# Altium PCB JacdacKeyboardKey 46.PcbDoc
Units mm, origin at the board's own origin, x right, y up, seen from the top; angles counter-clockwise.
Board outline 21.5 x 28.2 mm, 2 copper layers (Top Layer, Bottom Layer), stack 1.525 mm thick; 22 components, 9 nets, 68 pads, 11 vias.
Unrouted connection lines stored in the file: 10.
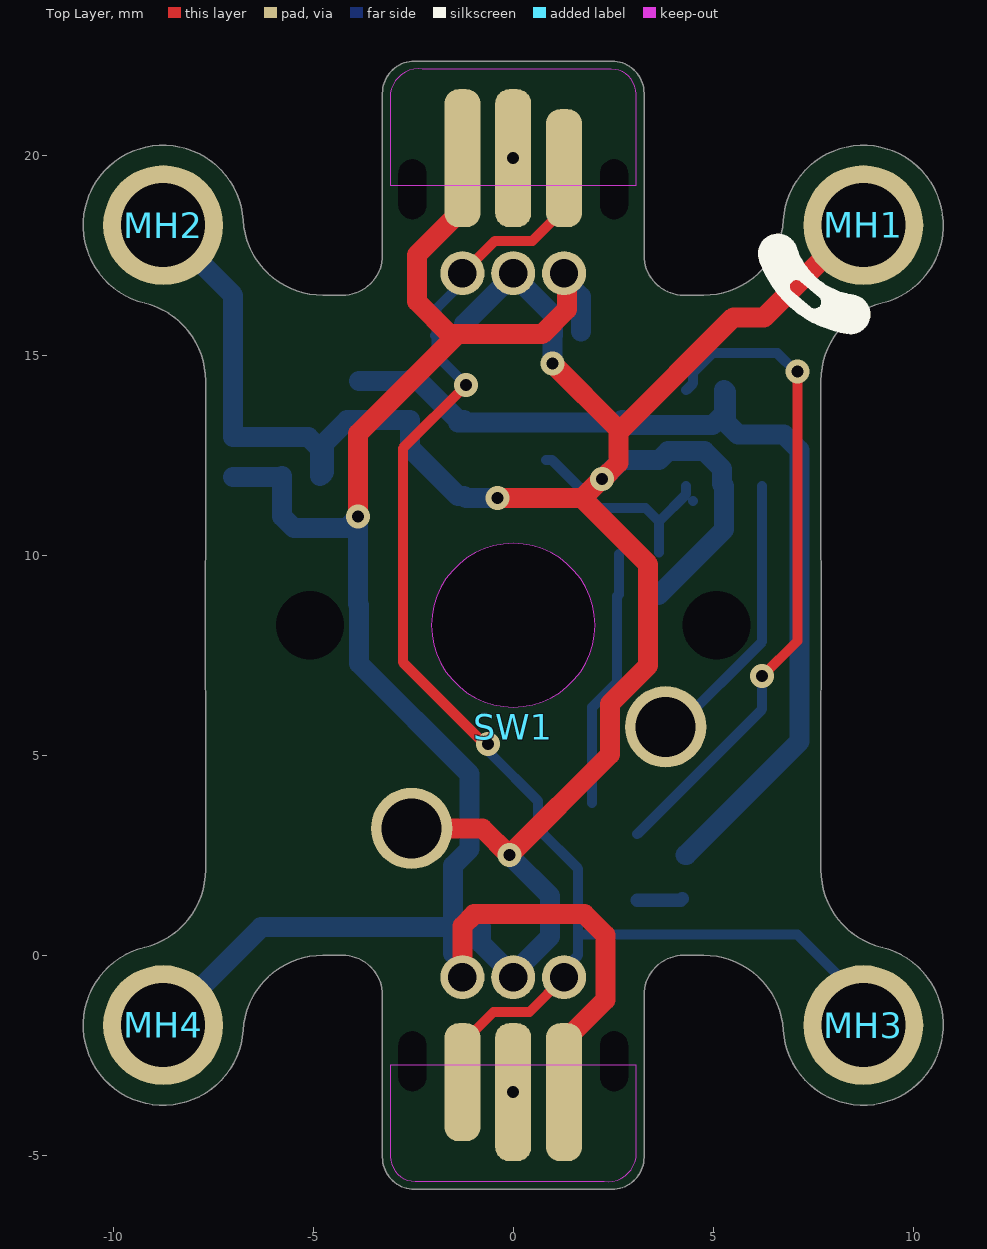
[diagram p0: Top Layer view]
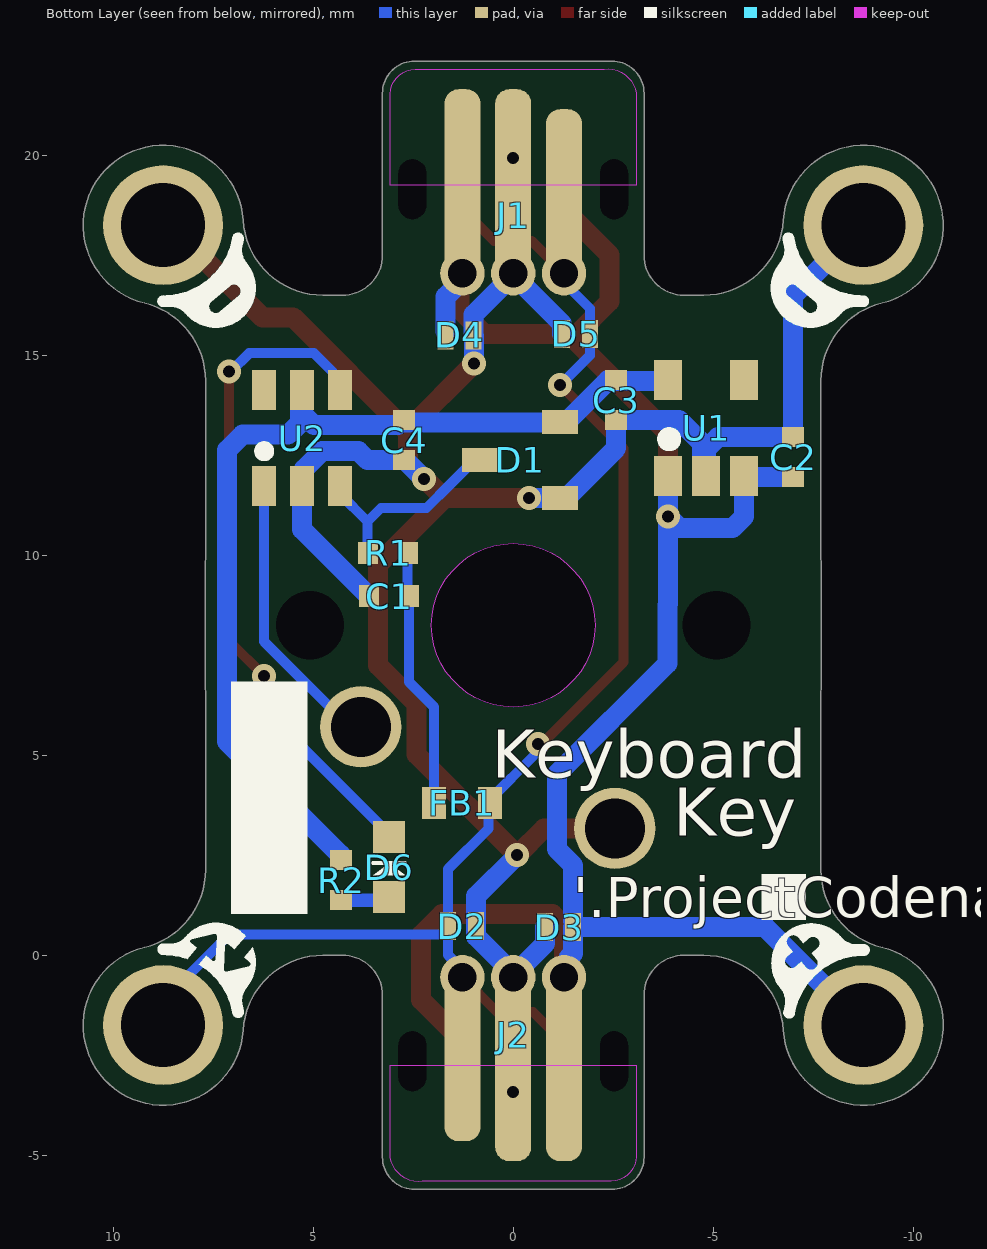
[diagram p1: Bottom Layer view, seen from below]

## Layer stack, top to bottom
Top Solder: solder mask 0.0102, Solder Resist, Dk 3.5
Top Layer: signal copper 0.0356
Dielectric 1: core 1.454, FR-4, Dk 4.2
Bottom Layer: signal copper 0.0356
Bottom Solder: solder mask 0.0102, Solder Resist, Dk 3.5

## Board outline
-9.222,0.194 ccw(c-8.75,-1.75) -6.754,-1.875 cw(c-4.758,-2) -4.758,0 -4.27,0 cw(c-4.27,-1) -3.27,-1 -3.27,-5.05 ccw(c-2.471,-5.051) -2.47,-5.85 2.47,-5.85 ccw(c2.471,-5.051) 3.27,-5.05 3.27,-1 cw(c4.27,-1) 4.27,0 4.758,0 cw(c4.758,-2) 6.754,-1.875 ccw(c8.75,-1.75) 9.222,0.194 cw(c9.693,2.137) 7.693,2.137 7.692,5 7.694,8.25 7.692,11.5 7.693,14.363 cw(c9.693,14.363) 9.222,16.306 ccw(c8.75,18.25) 6.754,18.375 cw(c4.758,18.5) 4.758,16.5 4.27,16.5 cw(c4.27,17.5) 3.27,17.5 3.27,21.55 ccw(c2.471,21.551) 2.47,22.35 -2.47,22.35 ccw(c-2.471,21.551) -3.27,21.55 -3.27,17.5 cw(c-4.27,17.5) -4.27,16.5 -4.758,16.5 cw(c-4.758,18.5) -6.754,18.375 ccw(c-8.75,18.25) -9.222,16.306 cw(c-9.693,14.363) -7.693,14.363 -7.692,11.5 -7.694,8.25 -7.692,5 -7.693,2.137 cw(c-9.693,2.137)
cut-out: -2.045,8.25 ccw(c0,8.25) 0,6.205 ccw(c0,8.25) 2.045,8.25 ccw(c0,8.25) 0,10.295 ccw(c0,8.25)

## Design rules (kind name [scope] priority, off if disabled: settings)
AssemblyTestPointUsage [All] p1: valid=2
BoardOutlineClearance [All] p1: gap=0.3 ignorepadtopadclearanceinfootprint=FALSE except(0: Arc-SplitContinuation Track-SplitContinuation SMDPad-SplitContinuation THPad-SplitContinuation Via-SplitContinuation Fill-SplitContinuation Poly-SplitContinuation Region-OutlineEdge Region-SplitContinuation Text-OutlineEdge Text-SplitContinuation; 0.2: Track-OutlineEdge Fill-CavityEdge Fill-CutoutEdge Fill-SplitBarrior Poly-CavityEdge Poly-CutoutEdge Poly-SplitBarrior Text-CavityEdge Text-CutoutEdge Text-SplitBarrior; 0.25: SMDPad-OutlineEdge)
Clearance [All] p1: gap=0.125 ignorepadtopadclearanceinfootprint=FALSE except(0: Arc-Hole Track-Hole SMDPad-Hole THPad-Hole Via-Hole Fill-Hole Poly-Hole Region-Hole Text-Hole)
ComponentClearance [All] p1: gap=0.1 collisioncheckmode=3 verticalgap=0.254 showdistances=FALSE
DiffPairsRouting [All] p1: maxlimit=2 minlimit=0.15 mostfreqgap=0.15 toplayer_minwidth=0.15 toplayer_maxwidth=2 toplayer_prefwidth=0.15 bottomlayer_minwidth=0.15 bottomlayer_maxwidth=2 bottomlayer_prefwidth=0.15 substack1={CB9D278B-8BF5-444A-AAF4-837A2A9DF42D} toplayer_{cb9d278b-8bf5-444a-aaf4-837a2a9df42d}_minwidth=0.381 toplayer_{cb9d278b-8bf5-444a-aaf4-837a2a9df42d}_maxwidth=0.381 toplayer_{cb9d278b-8bf5-444a-aaf4-837a2a9df42d}_prefwidth=0.381 bottomlayer_{cb9d278b-8bf5-444a-aaf4-837a2a9df42d}_minwidth=0.381 bottomlayer_{cb9d278b-8bf5-444a-aaf4-837a2a9df42d}_maxwidth=0.381 bottomlayer_{cb9d278b-8bf5-444a-aaf4-837a2a9df42d}_prefwidth=0.381 substack2={826B8647-A721-4255-895A-19F9591B9CD1} toplayer_{826b8647-a721-4255-895a-19f9591b9cd1}_minwidth=0.381 toplayer_{826b8647-a721-4255-895a-19f9591b9cd1}_maxwidth=0.381 toplayer_{826b8647-a721-4255-895a-19f9591b9cd1}_prefwidth=0.381 bottomlayer_{826b8647-a721-4255-895a-19f9591b9cd1}_minwidth=0.381 bottomlayer_{826b8647-a721-4255-895a-19f9591b9cd1}_maxwidth=0.381 bottomlayer_{826b8647-a721-4255-895a-19f9591b9cd1}_prefwidth=0.381 substack3={E64FCAF4-1BC8-437D-B1E0-0E5F2DC0F59E} toplayer_{e64fcaf4-1bc8-437d-b1e0-0e5f2dc0f59e}_minwidth=0.381 toplayer_{e64fcaf4-1bc8-437d-b1e0-0e5f2dc0f59e}_maxwidth=0.381 toplayer_{e64fcaf4-1bc8-437d-b1e0-0e5f2dc0f59e}_prefwidth=0.381 bottomlayer_{e64fcaf4-1bc8-437d-b1e0-0e5f2dc0f59e}_minwidth=0.381 bottomlayer_{e64fcaf4-1bc8-437d-b1e0-0e5f2dc0f59e}_maxwidth=0.381 bottomlayer_{e64fcaf4-1bc8-437d-b1e0-0e5f2dc0f59e}_prefwidth=0.381 substack4={E61CE66C-507C-4E1E-8E83-C905434AFC1C} toplayer_{e61ce66c-507c-4e1e-8e83-c905434afc1c}_minwidth=0.381 toplayer_{e61ce66c-507c-4e1e-8e83-c905434afc1c}_maxwidth=0.381 toplayer_{e61ce66c-507c-4e1e-8e83-c905434afc1c}_prefwidth=0.381 bottomlayer_{e61ce66c-507c-4e1e-8e83-c905434afc1c}_minwidth=0.381 bottomlayer_{e61ce66c-507c-4e1e-8e83-c905434afc1c}_maxwidth=0.381 bottomlayer_{e61ce66c-507c-4e1e-8e83-c905434afc1c}_prefwidth=0.381 maxuncoupledlength=25
FabricationTestPointUsage [All] p1: valid=2 allowmultiple=FALSE
HoleSize [All] p1: absolutevalues=TRUE maxlimit=2.54 minlimit=0.2 maxpercent=80.000 minpercent=20.000
MinimumSolderMaskSliver [All] p1: minsoldermaskwidth=0.005
PlaneClearance [All] p1: clearance=0.3
PlaneConnect [All] p1: planeconnectstyle=Relief reliefexpansion=0.5 reliefentries=4 reliefconductorwidth=0.2 reliefairgap=0.3
PolygonConnect "PolygonConnect GND" [isVIA] p1: connectstyle=Relief reliefconductorwidth=0.2 reliefentries=4 polygonreliefangle="90 Angle" airgapwidth=0.2
PolygonConnect [All] p2: connectstyle=Relief reliefconductorwidth=0.2 reliefentries=4 polygonreliefangle="90 Angle" airgapwidth=0.2
RoutingVias [All] p1: holewidth=0.3 width=0.6 viastyle="Through Hole" minholewidth=0.3 minwidth=0.6 maxholewidth=0.5 maxwidth=0.8
SilkToSilkClearance [All] p1: silktosilkclearance=0.001
SilkToSolderMaskClearance [IsPad] p1: minsilkscreentomaskgap=0.05 clearancetoexposedcopper=TRUE
SolderMaskExpansion TENT_VIAS [IsVia] p1: expansion=0.102 istentingtop=TRUE
SolderMaskExpansion [All] p2: expansion=0.075 istentingtop=FALSE
Width POWER [InNetClass('POWER')] p1: maxlimit=2.54 minlimit=0.203 preferedwidth=0.33 substack1={CB9D278B-8BF5-444A-AAF4-837A2A9DF42D} substack2={826B8647-A721-4255-895A-19F9591B9CD1} substack3={E64FCAF4-1BC8-437D-B1E0-0E5F2DC0F59E} substack4={E61CE66C-507C-4E1E-8E83-C905434AFC1C} minimp=50.000000 maximp=50.000000 favimp=50.000000
Width [All] p2: maxlimit=2 minlimit=0.15 preferedwidth=0.15 substack1={CB9D278B-8BF5-444A-AAF4-837A2A9DF42D} substack2={826B8647-A721-4255-895A-19F9591B9CD1} substack3={E64FCAF4-1BC8-437D-B1E0-0E5F2DC0F59E} substack4={E61CE66C-507C-4E1E-8E83-C905434AFC1C} minimp=50.000000 maximp=50.000000 favimp=50.000000
20 further rules are at their usual default settings.

## Components (designator, comment, footprint, x,y, rotation, side; value= is the part's Value field where it differs from the comment)
C1 "CL05C330JB5NNNC" "C0402_0.55MM - without outline" 3.1,8.975 r180 bottom
C2 "CL05A105KP5NNNC" "C0402_0.55MM - without outline" -7,12.45 r270 bottom
C3 "CL05A105KP5NNNC" "C0402_0.55MM - without outline" -2.575,13.875 r90 bottom
C4 "CL05A105KP5NNNC" "C0402_0.55MM - without outline" 2.725,12.875 r90 bottom
D1 "BAT54S" "NXP-BAT54S-TO-236AB - without outline" -0.175,12.375 r0 bottom
D2 "RCLAMP0521P-N" "TVS 0402 - L" 1.275,0.725 r180 bottom
D3 "RCLAMP0521P-N" "TVS 0402 - L" -1.15,0.7 r0 bottom
D4 "RCLAMP0521P-N" "TVS 0402 - L" 1.338,15.496 r180 bottom
D5 "RCLAMP0521P-N" "TVS 0402 - L" -1.575,15.525 r0 bottom
D6 "Everlight Elec'''" "0603 Orange" 3.1,2.2 r270 bottom
FB1 "TDK MPZ1608S102ATA00" "TDK MPZ1608 0.8mm - without outline" 1.275,3.8 r0 bottom
J1 "3 pin JACDAC edge connector" JACDAC_EDGE_CONNECTOR_NO_TRACES 0,16.5 r180 bottom
J2 "3 pin JACDAC edge connector" JACDAC_EDGE_CONNECTOR_NO_TRACES 0,0 r0 bottom
MH1 "MH_5.0MMK_3.0MMC_2.1MMD_PTH" MH_5.0MMK_3.0MMC_2.1MMD_PTH 8.75,18.25 r0 top
MH2 "MH_5.0MMK_3.0MMC_2.1MMD_PTH" MH_5.0MMK_3.0MMC_2.1MMD_PTH -8.75,18.25 r180 top
MH3 "MH_5.0MMK_3.0MMC_2.1MMD_PTH" MH_5.0MMK_3.0MMC_2.1MMD_PTH 8.75,-1.75 r0 top
MH4 "MH_5.0MMK_3.0MMC_2.1MMD_PTH" MH_5.0MMK_3.0MMC_2.1MMD_PTH -8.75,-1.75 r180 top
R1 "RC0402FR-07220RL" "R0402 - Without outline" 3.125,10.05 r180 bottom
R2 "RC0402FR-071KL" "R0402 - Without outline" 4.3,1.875 r90 bottom
SW1 "Mechanical keyboard mount" MX1A-11NW 0,8.25 r180 top
U1 "ME6211C33M5G-N" MICRONE-SOT23-5 -4.825,13.175 r90 bottom
U2 "PMS150C" SOT23-6 5.275,12.925 r90 bottom

## Footprints (in the part's own frame and the unit in brackets; to place one, negate y for a bottom-side part, rotate by r counter-clockwise, add the part's x,y. Pads: shape width x height; smd on the part's side, far side on the other; paste and mask are expansions set on the pad)
"0603 Orange" [mm]
  rect 0.8x0.8 smd paste-0.05: 1(-0.75,0) 2(0.75,0)
  silkscreen extent -0.1,-0.4 0.2,0.4, body extent -0.79,-0.4 0.81,0.4, height 0.4
"C0402_0.55MM - without outline" [mm]
  rect 0.5x0.55 smd: 1(-0.5,0) 2(0.5,0)
  body extent -0.5,-0.25 0.5,0.25, height 0.55
JACDAC_EDGE_CONNECTOR_NO_TRACES [mm] "JacDac 3 pin connector with no traces"
  rrect78% 0.9x2.95 smd far side paste-1 mask+0: 1(-1.27,3.175)
  round 1.11 / inner round 0.71 / far side round 1.1 hole 0.71 paste-0.254 mask+0: 1(1.27,0.55) 2(0,0.55) 3(-1.27,0.55)
  rrect78% 0.9x4.3 smd paste-1 mask+0: 1(1.27,2.5)
  rrect78% 0.9x4.8 smd paste-1 mask+0: 2(0,2.75) 3(-1.27,2.75)
  rrect78% 0.9x3.45 smd far side paste-1 mask+0: 2(0,3.425) 3(1.27,3.425)
  round 0 hole 0.7 slot 1.5 at 90 deg unplated: ""(-2.52,2.65) ""(2.52,2.65)
  Top Layer keep-out region: -3.075,2.75 -3.07,5.033 -2.987,5.341 -2.761,5.567 -2.453,5.65 -2.453,5.65 2.27,5.65 2.545,5.635 2.794,5.516 2.978,5.31 3.07,5.05 3.07,5.05 3.07,2.75
  Bottom Layer lines w0.2: -1.126,0.85 -1.27,0.85
  Bottom Layer keep-out region: -3.07,2.75 -3.07,5.033 -3.023,5.269 -2.889,5.469 -2.689,5.603 -2.453,5.65 -2.453,5.65 2.27,5.65 2.545,5.635 2.794,5.516 2.978,5.31 3.07,5.05 3.07,5.05 3.07,2.75
MH_5.0MMK_3.0MMC_2.1MMD_PTH [mm] "Mounting Hole 5.0mm clearance, 3.1 annualar ring and 2.1mm PTH"
  round 3 hole 2.1 mask+0.05: 1(0,0)
MICRONE-SOT23-5 [mm]
  rect 1x0.7 smd: 1(-1.2,0.95) 2(-1.2,0) 3(-1.2,-0.95) 4(1.2,-0.95) 5(1.2,0.95)
  silkscreen extent -0.32,0.88 -0.23,0.97, body extent -1.32,-1.5 1.32,1.5, height 1.11
MX1A-11NW [mil] "Mechanical keyswitch mount SPST"
  round 80 hole 59 paste-10: 1(-150,100) 2(100,200)
  round 0 hole 67 unplated paste-10: 3(-200,0) 3(200,0)
  body extent -307,-307 307,307, height 598
"NXP-BAT54S-TO-236AB - without outline" [mm] "SOT23, 3-Leads, Body 2.90x2.30mm, Pitch 0.95mm, IPC Medium Density"
  rect 0.9x0.6 smd: 1(-1,0.95) 2(-1,-0.95) 3(1,0)
  body extent -1.32,-1.5 1.32,1.5, height 1.12
"R0402 - Without outline" [mm]
  rect 0.5x0.55 smd: 1(-0.5,0) 2(0.5,0)
  body extent -0.5,-0.25 0.5,0.25, height 0.35
SOT23-6 [mm] "SOT23, 6-Leads, Body 2.90x2.45mm, Pitch 0.95mm, IPC Medium Density"
  rect 1x0.6 smd: 1(-1.2,0.95) 2(-1.2,0) 3(-1.2,-0.95) 4(1.2,-0.95) 5(1.2,0) 6(1.2,0.95)
  silkscreen extent -0.42,0.85 -0.23,1.05, body extent -1.4,-1.45 1.4,1.45, height 1.45
"TDK MPZ1608 0.8mm - without outline" [mm]
  rect 0.6x0.8 smd paste-0.1: 1(-0.7,0) 2(0.7,0)
  body extent -0.8,-0.4 0.8,0.4, height 0.8
"TVS 0402 - L" [mm] "TVS 0402 RoHS"
  rect 0.4x0.7 smd paste-0.038 mask+0.05: 1(-0.35,0) 2(0.35,0)
  body extent -0.5,-0.3 0.5,0.3, height 0.5

## Part data
C1: "CAP CER 33PF 50V C0G/NP0 0402", Capacitance=33pF, Case Code (Imperial)=0402, Case Code (Metric)=1005, Dielectric=C0G, Manufacturer=Samsung, Max Operating Temperature=125°C, Min Operating Temperature=-55°C, Package Quantity=1, Supplier Part Number 1=1276-1272-1-ND, Temperature Coefficient=300ppm/°C, Tolerance=5%, Voltage=50V, Case/Package=0402, Category="Ceramic Capacitors", ComponentLink1Description="Online datasheet", ComponentLink1URL=https://datasheet.ciiva.com/15195/getdatasheetpartid-355282-15195687.pdf, Construction=Flat, Contact Plating=Tin, Depth=0.5mm, Height=0.5mm, Lead Free="Lead Free", Length=1mm, Manufacturer Part Number=CL05C330JB5NNNC, Material=Ceramic, Mount="Surface Mount", Packaging="Tape and Reel", Pricing 1="1=0.10000, 10=0.02300, 50=0.01260, 100=0.01040, 500=0.00740, 1000=0.00582, 2500=0.00529, 5000=0.00487 (USD)", Pricing 2="1=0.12500, 25=0.02900, 100=0.01300, 250=0.01100, 500=0.00900, 1000=0.00600 (USD)", Pricing 3="1=0.10000, 10=0.01400, 50=0.01400, 100=0.01100, 1000=0.00600, 10000=0.00400 (USD)", Pricing 4="150=0.01120, 500=0.00860, 2500=0.00640, 5000=0.00550 (GBP)", Radiation Hardening=No, RoHS=Yes, RoHS Compliant=Yes, Series=CL, Stock 1=5436088, Stock 2=45340, Stock 3=8877, Stock 4=10934, Supplier 1=Digi-Key, Supplier 2=Newark, Supplier 3=Mouser, Supplier 4=Farnell, Supplier Part Number 2=82AC9259, Supplier Part Number 3=187-CL05C330JB5NNNC, Supplier Part Number 4=3013373RL, Thickness=0.022inch, Voltage Rating=50V, Voltage Rating (DC)=50V, Width=0.02inch
C2 C3 C4: "CAP CER 1UF 10V X5R 0402", Capacitance=1µF, Case Code (Imperial)=0402, Case Code (Metric)=1005, Dielectric=X5R, Manufacturer=Samsung, Max Operating Temperature=85°C, Min Operating Temperature=-55°C, Package Quantity=1, Supplier Part Number 1=1276-1076-1-ND, Tolerance=10%, Voltage Rating=10V, Case/Package=0402, Category=Capacitors, Checked=?, ComponentLink1Description="Online datasheet", ComponentLink1URL=https://datasheet.ciiva.com/15195/getdatasheetpartid-358390-15195630.pdf, Contact Plating=Tin, Created=DG, Depth=0.5mm, Height=0.5mm, Length=1mm, Manufacturer Part Number=CL05A105KP5NNNC, Material=Ceramic, Mount="Surface Mount", Packaging="Tape and Reel", Pricing 1="1=0.10000, 10=0.03900, 50=0.02100, 100=0.01720, 500=0.01228, 1000=0.00965, 2500=0.00877, 5000=0.00807 (USD)", Pricing 2="1=0.10000, 10=0.04200, 100=0.01800, 500=0.01300, 1000=0.01000, 2500=0.00900 (USD)", Pricing 3="10=0.02450, 100=0.02000, 500=0.01310, 2500=0.00920, 5000=0.00810, 10000=0.00640, 50000=0.00490 (GBP)", Radiation Hardening=No, RoHS=Yes, Stock 1=5705569, Stock 2=928941, Stock 3=53670, Supplier 1=Digi-Key, Supplier 2=Mouser, Supplier 3=Farnell, Supplier Part Number 2=187-CL05A105KP5NNNC, Supplier Part Number 3=3013329, Thickness=0.022inch, Width=0.02inch
D1: "DIODE ARRAY SCHOTTKY 30V SOT23", Manufacturer=Nexperia, Manufacturer Part Number=BAT54S,235, Supplier Part Number 1=1727-1868-1-ND, Category="Rectifier Diodes", ComponentLink1Description="NXP datasheet online", ComponentLink1URL=https://assets.nexperia.com/documents/data-sheet/BAT54_SER.pdf, Pricing 1="1=0.13000, 10=0.11900, 100=0.05610, 500=0.03326, 1000=0.02185, 5000=0.02138 (USD)", RoHS=No, Stock 1=14011, Supplier 1=Digi-Key, Supplier 2=Mouser, Supplier 3=RSComponents, Supplier Part Number 2=771-BAT54S235, Supplier Part Number 3=1707990
D2 D3 D4 D5: "Bidirectional 5V (Max) 6V 16V 3.5A (8/20us) 0402 TVS RoHS", Manufacturer="Born Semiconductor", Package=0402, Supplier1 Part Number=C316043, Checked By=?, ComponentLink1Description="Online datasheet", ComponentLink1URL=https://datasheet.lcsc.com/szlcsc/Bourne-Semicon-Shenzhen-RCLAMP0521P-N_C316043.pdf, Created By="D Gakure", Manufacturer Part Number=RCLAMP0521P-N, Supplier1=LCSC
D6: library part 19-217/S2C-AQ1R1B/3T, "LED ORANGE DIFFUSED 0603 SMD", Case Code (Imperial)=0603, Color=Orange, Manufacturer="Everlight Elec", Supplier 1 Part Number=C146215, Case/Package=0603, Colour=Orange, ComponentLink1Description="Online datasheet", ComponentLink1URL=https://datasheet.lcsc.com/lcsc/1912171731_Everlight-Elec-19-217-S2C-AQ1R1B-3T_C146215.pdf, Manufacturer Part Number=19-217/S2C-AQ1R1B/3T, Mount="Surface Mount", Supplier 1=LCSC
FB1: "0603 1k@100MHz 0.8A chip", Case Code (Imperial)=0603, Case Code (Metric)=1608, Current Rating=800mA, DC Resistance (DCR)=300mR, Manufacturer=TDK, Manufacturer Part Number=MPZ1608S102ATA00, Package Quantity=4000, Supplier Part Number 1=445-8694-1-ND, Tolerance=25%, Case/Package=0603, ComponentLink2Description="datasheet online", ComponentLink2URL=https://www.mouser.co.uk/datasheet/2/400/eads_commercial_power_mpz1608_en-923650.pdf, ComponentLink3Description=datasheet, ComponentLink3URL="Y:\System\Altium\Libraries 2014\TDK\Datasheets\eads_commercial_power_mpz1608_en-923650.pdf", Core Material=Ferrite, Height=0.037inch, Impedance="1kR @ 100MHz", Length=0.063inch, Max DC Current=800mA, Mount="Surface Mount", Packaging="Tape and Reel", Pricing 1="1=0.1, 10=0.079, 25=0.0716, 50=0.0644, 100=0.0472, 250=0.03432, 500=0.03146, 1000=0.02717 (USD)", Stock 1=113542, Supplier 1=Digi-Key, Supplier 2=Mouser, Supplier Part Number 2=810-MPZ1608S102ATA00, Width=0.031inch
J1 J2: library part "Jacdac edge connector", "3 pin Jacdac edge connector 1.27mm pitch", Manufacturer Part Number=JACDAC_EDGE_CONNECTOR, Checked By=?, ComponentLink1Description="Yuliang JACDAC cable connector drawing online", ComponentLink1URL=https://github.com/microsoft/jacdac-mdk/blob/main/connector/JACDAC-Connector-by-Yuliang-2020-11-28.pdf, ComponentLink2Description="JACDAC PCB edge connector spec onlin", ComponentLink2URL=https://github.com/microsoft/jacdac-mdk/blob/main/connector/JACDAC_PCB_Edge_Connector_Drawing_JD-PEC-01_rev_01.pdf, Created By="D. Gakure", PCB Type="1.6mm FR4"
MH1 MH2 MH3 MH4: "Mounting Hole 5.0mm keepout, 3.0mm annualar ring and 2.1mm Drill PTH"
R1: "RES SMD 220 OHM 1% 1/16W 0402", Case Code (Imperial)=0402, Case Code (Metric)=1005, Manufacturer=Yageo, Max Operating Temperature=155°C, Max Power Dissipation=63mW, Min Operating Temperature=-55°C, Package Quantity=1, Power Rating=62.5mW, Resistance=220R, Resistor Type="Thick Film", Supplier Part Number 1=311-220LRCT-ND, Temperature Coefficient=100ppm/°C, Tolerance=1%, Voltage Rating=50V, Case/Package=0402, Category=Resistors, Checked=?, ComponentLink1Description="Online datasheet", ComponentLink1URL=https://datasheet.ciiva.com/11819/0900766b80c66297-11819466.pdf, Created=D.G, Depth=0.5mm, Features="Moisture Resistant", Height=0.016inch, Lead Free="Lead Free", Length=1mm, Manufacturer Part Number=RC0402FR-07220RL, Military Standard=Not, Number of Pins=2, Number of Terminations=2, Packaging="Tape and Reel", Pricing 1="1=0.10000, 10=0.01400, 100=0.00580, 1000=0.00262, 2500=0.00228, 5000=0.00188 (USD)", Pricing 2="1=0.10000, 10=0.01200, 100=0.00400, 1000=0.00400, 2500=0.00400, 10000=0.00300 (USD)", Pricing 3="1=0.08130, 25=0.01210, 100=0.01120, 250=0.01030, 500=0.00900 (GBP)", REACH SVHC="No SVHC", RoHS=Yes, Stock 1=1286042, Stock 2=324625, Stock 3=18234, Supplier 1=Digi-Key, Supplier 2=Mouser, Supplier 3=Farnell, Supplier Part Number 2=603-RC0402FR-07220RL, Supplier Part Number 3=2147864, Termination=SMD/SMT, Voltage Rating (DC)=50V, Width=0.02inch
R2: "RES SMD 1K OHM 1% 1/16W 0402", Case Code (Imperial)=0402, Case Code (Metric)=1005, Manufacturer=Yageo, Max Operating Temperature=155°C, Min Operating Temperature=-55°C, Power Rating=62.5mW, Resistance=1kR, Resistor Type="Thick Film", Supplier Part Number 1=311-1.00KLRDKR-ND, Temperature Coefficient=100ppm/°C, Tolerance=1%, Voltage Rating=50V, Case/Package=0402, Category=Resistors, Checked=?, ComponentLink2Description="Online datasheet", ComponentLink2URL=https://datasheet.ciiva.com/12666/pyu-rc0402-51-rohs-l-6-r-12666741.pdf, Created=D.G, Depth=0.5mm, Height=0.32mm, Lead Free="Lead Free", Length=1mm, Manufacturer Part Number=RC0402FR-071KL, Military Standard=Not, Number of Pins=2, Packaging="Tape and Reel", Pricing 1="1=0.10000, 10=0.01400, 100=0.00580, 1000=0.00262, 2500=0.00228, 5000=0.00188 (USD)", Pricing 2="1=0.10000, 10=0.01200, 100=0.00400, 1000=0.00400, 2500=0.00400, 10000=0.00300 (USD)", Pricing 3="1=0.08130, 25=0.01210, 100=0.01120, 250=0.01030, 500=0.00900 (GBP)", REACH SVHC=Unknown, RoHS=Yes, Stock 1=37591306, Stock 2=11912978, Stock 3=29900, Supplier 1=Digi-Key, Supplier 2=Mouser, Supplier 3=Farnell, Supplier Part Number 2=603-RC0402FR-071KL, Supplier Part Number 3=2132441, Termination=SMD/SMT, Voltage Rating (DC)=50V, Width=0.5mm
SW1: library part MX1A-11NW, "Pushbutton Switch SPST-NO Keyswitch Through Hole", Case/Package=Module, Contact Current Rating=10mA, Contact Resistance=200mR, Flammability Rating="UL94 HB", Insulation Resistance=100MR, Manufacturer 1=Cherry, Max Current Rating=100mA, Max Operating Temperature=70°C, Max Voltage Rating (AC)=12V, Min Operating Temperature=-10°C, Operating Force=0.58N, Package Quantity=1000, Supplier Part Number 1=CH160-ND, Actuator Length=3.6mm, Actuator Type=PLUNGER, Category="Pushbutton Switches", ComponentLink1Description="datasheet (offline)", ComponentLink1URL="Y:\System\Altium\Libraries 2014\Cherry\Datasheets\MX1A-11NW.pdf", ComponentLink2Description="datasheet (online)", ComponentLink2URL=http://www.farnell.com/datasheets/2775479.pdf, Contact Material=Gold,Silver, Contact Plating=Gold, Contact Type="1 maker", Current Rating=10mA, Electrical Life=50000000Cycles, Housing Material=Thermoplastic, Illumination Type=Illuminated, Lead Free="Lead Free", Manufacturer Part Number 1=MX1A-11NW, Max Voltage Rating (DC)=12V, Mount="Through Hole,PCB", Number of Pins=2, Number of Terminals/Pins=2, Orientation=Straight, Packaging=Bulk, Pricing 1="1=0.94000, 10=0.83800, 25=0.79520, 50=0.75640, 100=0.72110, 250=0.68932, 500=0.61862, 1000=0.58328 (USD)", REACH SVHC=Unknown, RoHS=Yes, RoHS Compliant=Yes, Row Spacing=6.35mm, Series=MX, Stock 1=55920, Supplier 1=Digi-Key, Supplier 2=Farnell, Supplier 3=Mouser, Supplier Part Number 2=2292961, Supplier Part Number 3=540-MX1A-11NW, Switch Function=Off-Mom, Switching Current=10mA, Terminal Pitch=2.54mm, Termination="PC Pin", Throw Configuration=SPST, Voltage Rating (AC)=12V, Voltage Rating (DC)=12V
U1: "6V 260mV @ 200mA(typ) - - Fixed 3.3V SOT-23-5 Linear Voltage Regulators (LDO) ROHS", Case/Package=SOT-23-5, Dropout Voltage=200mV, Manufacturer="MICRONE(Nanjing Micro One Elec)", Max Input Voltage=6, Min Output Voltage=3.3V, Output Current=500mA, Supplier Part Number=C82942, Category="Voltage Regulators - Linear", Checked=?, ComponentLink3Description="On Semi datasheet online", ComponentLink3URL=https://datasheet.lcsc.com/lcsc/1811131510_MICRONE-Nanjing-Micro-One-Elec-ME6211C33M5G-N_C82942.pdf, Created=DG, Manufacturer Part Number=ME6211C33M5G-N, Mount="Surface Mount", Number of Regulators=1, Output Configuration=Positive, Output Type=Fixed, Pricing 1="1=0.33000, 10=0.24900, 25=0.21760, 100=0.12440, 250=0.11664, 500=0.09330, 1000=0.07153 (USD)", Stock 1=32529, Supplier 1=LCSC
U2: "8bit OTP Type IO Controller", Manufacturer=PADAUK, Manufacturer Part Number=PMS150C-U6, Package=SOT-23-6, Supplier Part Number 1=C168658, ComponentLink1Description="Online datasheet", ComponentLink1URL=http://www.padauk.com.tw/upload/doc/PMS15A,PMS150C%20datasheet%20V108_EN_20200724.pdf, Pricing 1="1=0.6, 10=0.0595, 100=0.0449", Stock 1=0, Supplier 1=LCSC, Supplier Order Qty 1=3000

## Via types
v1: diameter 0.6, hole 0.3, Top Layer to Bottom Layer, tented both sides, 11 vias

## Nets (pads, with @x,y where several pads share a name; then routed paths per layer and width w, separated by ;. In a path a pad name is that pad's centre, name@x,y a point inside that pad or via, vN(x,y) a via of type N, cw(c..) or ccw(c..) an arc to the next point about the centre after c; other vN are vias at no path point)
3V3: C3.2 C4.2 D1.2 R2.2 U1.5 U2.5 | length 24.8
  Bottom Layer w0.5: U1.5@-3.853,14.353 -2.622,14.353 -2.6,14.375 C3.2@-2.597,14.375 ; C3.2 -2.375,14.375 -1.375,13.375 -1.225,13.375 D1.2 ; D1.2@-1.375,13.324 C4.2@2.801,13.324 ; C4.2 2.75,13.375 2.875,13.25 4.982,13.25 5.275,13.543 U2.5 5.325,14.075 5.325,13.314 5.625,13.014 6.769,13.014 7.151,12.632 7.151,5.341 4.335,2.525 4.335,2.5 R2.2@4.31,2.5
BUTTON: SW1.1 U2.1 | length 7.2
  Bottom Layer w0.25: SW1.1 4.097,5.71 6.225,7.838 U2.1
GND: C1.1 C2.1 C3.1 C4.1 D1.1 D2.2 D3.2 D4.2 D5.2 J1.2 J2.2 MH1.1 MH2.1 SW1.2 U1.2 U2.2 | length 61.7
  Top Layer w0.5: SW1.2 -0.766,3.17 v1(-0.098,2.502) 2.419,5.019 2.419,6.286 3.375,7.242 3.375,9.773 1.723,11.425 ; v1(-0.389,11.425) 1.723,11.425 ; v1(0.978,14.796) 2.63,13.144 2.63,13.077 ; MH1.1 8.575,18.25 6.274,15.948 5.501,15.948 2.63,13.077 ; 1.723,11.425 2.198,11.9 v1(2.225,11.9) 2.63,12.305 2.63,13.077
  Bottom Layer w0.33: C1.1 C1.1@3.6,9
  Bottom Layer w0.5: MH2.1 -7,16.5 C2.1 -5.118,12.95 -4.825,12.657 U1.2 -4.725,12.075 -4.725,12.8 -4.15,13.375 C3.1 -2.575,12.675 -1.375,11.475 -1.225,11.475 D1.1 v1(-0.389,11.425) ; D5.2 -1.225,15.78 J1.2@0,17.005 ; D3.2 -0.8,0.295 J2.2@0,-0.505 ; v1@-0.079,2.483 0.925,1.479 0.925,0.471 0,-0.454 J2.2@0,-0.505 ; J2.2@0,-0.55 J2.2@0,-0.505 ; J1.2@0,17.05 J1.2@0,17.005 ; v1(0.978,14.796) 0.983,14.801 0.983,15.491 D4.2 0.988,16.016 J1.2@0,17.005 ; v1(2.225,11.9) 2.7,12.375 C4.1 3.645,12.375 3.87,12.6 4.78,12.6 5.225,12.155 5.225,11.775 U2.2 5.275,10.645 3.63,9 C1.1@3.6,9
  other v1: 0,-3.425 0,19.925
JD_DATA: D2.1 D5.1 FB1.1 J1.1 J2.1 MH3.1 | length 37.8
  Top Layer w0.25: J2.1@-1.27,-3.175 -1.27,-2.195 -0.492,-1.417 0.403,-1.417 J2.1@1.27,-0.55 ; J1.1@-1.27,17.05 -0.459,17.861 0.481,17.861 1.27,18.65 J1.1@1.27,19.675 ; v1(-1.175,14.257) -2.76,12.673 -2.76,7.325 -0.71,5.275 v1(-0.625,5.275)
  Bottom Layer w0.25: D5.1@-1.955,15.495 D5.1 -1.917,15.517 -1.917,15 v1(-1.175,14.257) v1@-1.175,14.175 ; D5.1@-1.917,15.581 -1.917,16.17 -1.27,16.817 J1.1@-1.27,17.05 ; v1(-0.625,5.275) -0.558,5.208 -0.558,5.033 0.613,3.862 0.613,3.171 1.625,2.16 D2.1 D2.1@1.625,0.585 ; J2.1@1.27,-0.55 1.27,-0.355 1.625,0 D2.1@1.625,0.585 ; MH3.1 8.75,-1.13 7.107,0.513 1.697,0.513 D2.1@1.625,0.585
JD_DATA_MCU: D1.3 R1.1 U2.3 | length 5.4
  Bottom Layer w0.25: D1.3 0.975,12.375 1.574,11.776 1.574,11.774 2.17,11.177 3.307,11.177 3.642,10.842 ; R1.1@3.642,10.067 3.642,10.842 ; U2.3 4.325,11.525 3.642,10.842 ; U2.3@4.492,11.35 U2.3@4.5,11.35
JD_PWR: C2.2 D3.1 D4.1 J1.3 J2.3 MH4.1 U1.1 U1.3 | length 52.5
  Top Layer w0.5: v1(-3.875,10.968) -3.875,13.042 -1.392,15.525 ; J2.3@-1.27,-0.55 -1.27,0.732 -0.977,1.025 1.782,1.025 2.304,0.503 2.304,-1.116 1.27,-2.15 J2.3@1.27,-3.425 ; J1.3@-1.27,19.925 -1.27,18.65 -2.408,17.512 -2.408,16.341 -1.592,15.525 -1.27,15.525 0.722,15.525 1.339,16.142 1.339,16.981 J1.3@1.27,17.05
  Bottom Layer w0.5: MH4.1 -6.3,0.7 D3.1 -1.5,0.048 -1.387,-0.065 -1.387,-0.433 J2.3@-1.27,-0.55 ; C2.2 -5.8,11.95 U1.3 -5.775,10.968 -5.482,10.675 -4.168,10.675 v1(-3.875,10.968) ; U1.1 v1(-3.875,10.968) ; D3.1@-1.5,0.85 -1.5,2.243 -1.089,2.654 -1.089,4.526 -3.854,7.292 -3.854,8.758 -3.875,8.779 v1(-3.875,10.968) ; J1.3@1.27,17.05 1.27,16.885 1.689,16.466 D4.1@1.689,15.596
JD_STATUS: D6.1 U2.4 | length 16.7
  Top Layer w0.25: v1(6.225,6.979) 7.104,7.858 v1(7.104,14.597)
  Bottom Layer w0.25: D6.1@3.1,3.025 6.225,6.15 v1(6.225,6.979) ; U2.4 4.5,14.3 4.5,14.57 4.98,15.05 6.602,15.05 7.055,14.597 v1(7.104,14.597)
NetC1_2: C1.2 FB1.2 R1.2 | length 6.5
  Bottom Layer w0.25: FB1.2 1.975,6.2 2.6,6.825 C1.2 2.638,9.013 R1.2@2.638,10.037
NetD6_2: D6.2 R2.1 | length 1.1
  Bottom Layer w0.33: D6.2@3.1,1.375 4.19,1.375 4.225,1.41 R2.1@4.225,1.415
pads on no net: J1. J2. SW1.3 U1.4 U2.6

## Silkscreen, mask and mechanical layers (free items; w line width, h text height)
Top Overlay:
  region: 187 vertices and 1 holes, not listed, extent 6.121,15.529 8.925,18.035
Bottom Overlay:
  drawing of 6 lines, arcs and shapes, not listed
  text "Keyboard" at 0.54,4.435 h1.2
  text "Key" at -4.005,2.987 h1.2
  text "'.ProjectCodenameID'-'.ProjectRevision'" at -1.5,0.95 h1
Dimension:
  the board outline again, w0.05
Board Outline:
  circle w0.1: c0,8.25 r2.045
  lines w0.1: -9.222,0.194 ccw(c-8.75,-1.75) -6.754,-1.875 cw(c-4.758,-2) -4.758,0 -4.27,0 cw(c-4.27,-1) -3.27,-1 -3.27,-5.05 ccw(c-2.471,-5.051) -2.47,-5.85 2.47,-5.85 ccw(c2.471,-5.051) 3.27,-5.05 3.27,-1 cw(c4.27,-1) 4.27,0 4.758,0 cw(c4.758,-2) 6.754,-1.875 ccw(c8.75,-1.75) 9.222,0.194 cw(c9.693,2.137) 7.693,2.137 7.692,5 7.694,8.25 7.692,11.5 7.693,14.363 cw(c9.693,14.363) 9.222,16.306 ccw(c8.75,18.25) 6.754,18.375 cw(c4.758,18.5) 4.758,16.5 4.27,16.5 cw(c4.27,17.5) 3.27,17.5 3.27,21.55 ccw(c2.471,21.551) 2.47,22.35 -2.47,22.35 ccw(c-2.471,21.551) -3.27,21.55 -3.27,17.5 cw(c-4.27,17.5) -4.27,16.5 -4.758,16.5 cw(c-4.758,18.5) -6.754,18.375 ccw(c-8.75,18.25) -9.222,16.306 cw(c-9.693,14.363) -7.693,14.363 -7.692,11.5 -7.694,8.25 -7.692,5 -7.693,2.137 cw(c-9.693,2.137) -9.222,0.194
Top Assy:
  the board outline again, w0.05
Bottom Assy:
  the board outline again, w0.05

## Dimensions
-7.692,5 to 7.693,2.137 on Dimension
-3.27,-5.05 to 3.27,-5.05 on Dimension
-8.75,18.25 to -8.75,-1.75 on Dimension
-2.47,-5.85 to -2.47,22.35 on Dimension
-8.75,-1.75 to 8.75,-1.75 on Dimension

## Text inside footprints (layer, text, board x,y; h text height)
J1: Alignment "board outline  / for 'innie'" at -4.53,14.519 h1.2; Alignment "board outline  / for 'outie'" at -5.14,17.364 h1.2; Mechanical 9 "Jacdac / cable connector  / body" at 4.821,26.508 h1.7
J2: Alignment "board outline  / for 'outie'" at 5.14,-0.864 h1.2 r180; Alignment "board outline  / for 'innie'" at 4.53,1.981 h1.2 r180; Mechanical 9 "Jacdac / cable connector  / body" at -4.821,-10.008 h1.7 r180
MH3: Assembly Notes "5mm dia keepout  / for traces and  / components to  / allow space for  / bushes/standoffs/ / nuts/screw heads" at 11.544,-0.861 h0.5; Assembly Notes "board outline can  / be on 2.0mm   / radius if necessary" at 11.544,-5.306 h0.5